# EAGLE board Prova Robô aspirador - Lais e Raphael (EAGLE 9.7.0)

Size 189.14 x 106.69 mm. Coordinates in mm from the lower left corner, seen from the top.
Outline: 0,0 189.14,0 189.14,106.69 0,106.69 0,0
Copper layers (1*16): Top 0.035mm / dielectric 1.5mm / Bottom 0.035mm
Design rules "default": minimum track width 6mil, minimum drill 0.35mm, track to track 6mil, track to pad 6mil, pad to pad 6mil, via to via 6mil, smd to smd 6mil, copper to edge 40mil, drill to drill 6mil, minimum pad ring 10mil, minimum via ring 8mil, stop-mask expansion 4mil, vias tented up to drill 0mil, thermal gap 10mil

## Footprints (pad centres in the part's own frame; a part is rotated, then mirrored left to right if it is on the bottom)
LEDRD254W60D565H860B_O = drill 0.981 pad 1.581: 1 -1.27,0; 2 1.27,0
HC-SR04 = drill 1.016 long: 1 -3.81,0; 2 -1.27,0; 3 1.27,0; 4 3.81,0
LEDRD254W60D565H860B = drill 0.981 pad 1.581: 1 -1.27,0; 2 1.27,0
RESAD1016W63L850D250B = drill 0.83 pad 1.43: 1 -5.08,0; 2 5.08,0
ARDUINO-UNO-R3-SHIELD = drill 1.016 pad 1.88: 3.3V 24.13,-2.54; 5V 24.13,0; A0 24.13,12.7; A1 24.13,15.24; A2 24.13,17.78; A3 24.13,20.32; A4 24.13,22.86; A5 24.13,25.4; AREF -24.13,-13.97; D2 -24.13,20.32; D3 -24.13,17.78; D4 -24.13,15.24; D5 -24.13,12.7; D6 -24.13,10.16; D7 -24.13,7.62; D8 -24.13,3.81; D9 -24.13,1.27; D10 -24.13,-1.27; D11 -24.13,-3.81; D12 -24.13,-6.35; D13 -24.13,-8.89; GND@0 24.13,2.54; GND@1 24.13,5.08; GND@2 -24.13,-11.43; IOREF 24.13,-7.62; NC 24.13,-10.16; RES 24.13,-5.08; RX -24.13,25.4; SCL -24.13,-19.05; SDA -24.13,-16.51; TX -24.13,22.86; VIN 24.13,7.62

## Placement (x,y rotation side)
DFAROL_D  ORANGE  [LEDRD254W60D565H860B_O]  130.24,98.78 180 top
DFAROL_E  ORANGE  [LEDRD254W60D565H860B_O]  69.28,98.78 180 top
DISTDIREITO  DISTANCE-SENSOR-4PINHC-SR04  [HC-SR04]  163.11,87.01 0 top
DISTESQUERDO  DISTANCE-SENSOR-4PINHC-SR04  [HC-SR04]  26.04,85.77 0 top
DRED  RED  [LEDRD254W60D565H860B]  130.24,78.46 180 top
DREE  RED  [LEDRD254W60D565H860B]  69.28,78.46 180 top
R2  1k  [RESAD1016W63L850D250B]  123.89,96.24 0 top
R3  1k  [RESAD1016W63L850D250B]  123.89,75.92 0 top
R4  1k  [RESAD1016W63L850D250B]  62.93,75.92 180 top
R5  1k  [RESAD1016W63L850D250B]  62.93,96.24 180 top
UASPIRADOR_DE_PÓ  ARDUINO-UNO-R3-SHIELD  [ARDUINO-UNO-R3-SHIELD]  112.45,29.84 270 top

## Library data of the parts
DFAROL_D DFAROL_E = Tinkercad; CATEGORY: Opto-Electronic; SUB-CATEGORY: LED; VALUE: LED_ORANGE
DISTDIREITO DISTESQUERDO R2-R5 UASPIRADOR_DE_PÓ = Tinkercad
DRED DREE = Tinkercad; CATEGORY: Opto-Electronic; SUB-CATEGORY: LED; VALUE: LED_RED

## Nets
DFAROL_D_C: DFAROL_D.2 R2.2
DFAROL_E_C: DFAROL_E.2 R5.1
DRED_C: DRED.2 R3.2
DREE_C: DREE.2 R4.1
UASPIRADOR_DE_PÓ_5V: DISTDIREITO.1 DISTESQUERDO.1 UASPIRADOR_DE_PÓ.5V
UASPIRADOR_DE_PÓ_D4: DISTDIREITO.2 UASPIRADOR_DE_PÓ.D4
UASPIRADOR_DE_PÓ_D5: DISTDIREITO.3 UASPIRADOR_DE_PÓ.D5
UASPIRADOR_DE_PÓ_D6: DISTESQUERDO.2 UASPIRADOR_DE_PÓ.D6
UASPIRADOR_DE_PÓ_D7: DISTESQUERDO.3 UASPIRADOR_DE_PÓ.D7
UASPIRADOR_DE_PÓ_D8: DRED.1 UASPIRADOR_DE_PÓ.D8
UASPIRADOR_DE_PÓ_D9: DREE.1 UASPIRADOR_DE_PÓ.D9
UASPIRADOR_DE_PÓ_D10: DFAROL_E.1 UASPIRADOR_DE_PÓ.D10
UASPIRADOR_DE_PÓ_D11: DFAROL_D.1 UASPIRADOR_DE_PÓ.D11
UASPIRADOR_DE_PÓ_GND: DISTDIREITO.4 DISTESQUERDO.4 R2.1 R3.1 R4.2 R5.2 UASPIRADOR_DE_PÓ.GND@0 UASPIRADOR_DE_PÓ.GND@1 UASPIRADOR_DE_PÓ.GND@2

## Tracks (layer width: path | path; a pad name or v marks a point on that pad's centre or on a via)
DFAROL_D_C  (1 unrouted)
DFAROL_E_C  (1 unrouted)
DRED_C  (1 unrouted)
DREE_C  (1 unrouted)
UASPIRADOR_DE_PÓ_5V  (2 unrouted)
UASPIRADOR_DE_PÓ_D4  (1 unrouted)
UASPIRADOR_DE_PÓ_D5  (1 unrouted)
UASPIRADOR_DE_PÓ_D6  (1 unrouted)
UASPIRADOR_DE_PÓ_D7  (1 unrouted)
UASPIRADOR_DE_PÓ_D8  (1 unrouted)
UASPIRADOR_DE_PÓ_D9  (1 unrouted)
UASPIRADOR_DE_PÓ_D10  (1 unrouted)
UASPIRADOR_DE_PÓ_D11  (1 unrouted)
UASPIRADOR_DE_PÓ_GND  (8 unrouted)